# Altium PCB QPB-V1.PcbDoc
Units mm, origin at the board's own origin, x right, y up, seen from the top; angles counter-clockwise.
Board outline 60.25 x 30.25 mm, 2 copper layers (TopLayer, BottomLayer); 28 components, 10 nets, 74 pads, 290 vias.
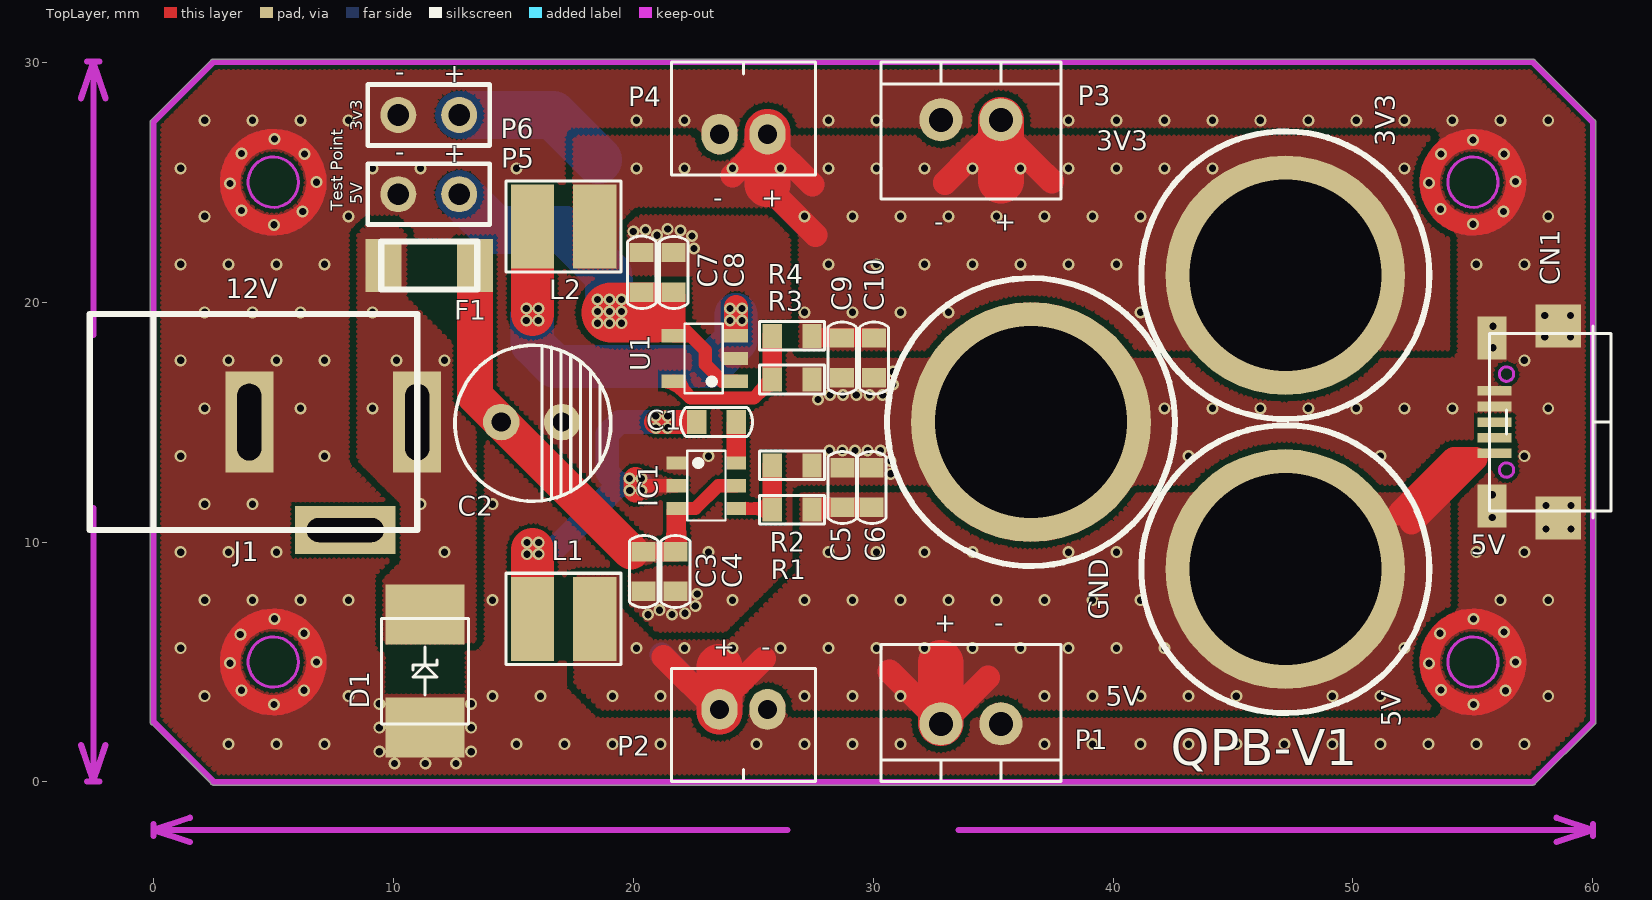
[diagram p0: TopLayer view]
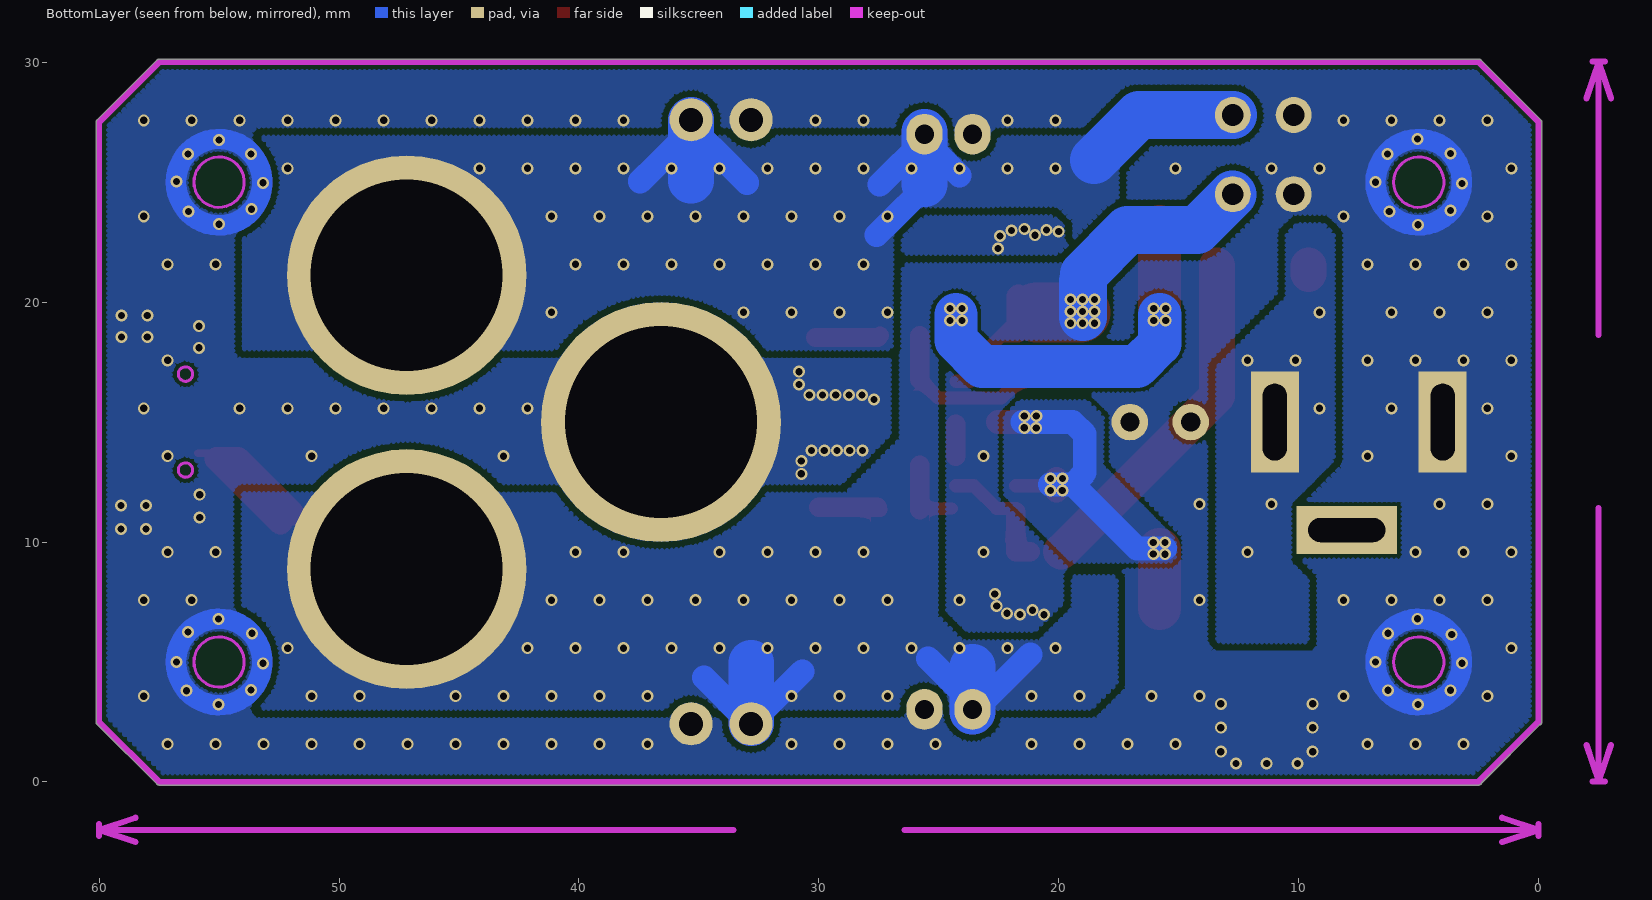
[diagram p1: BottomLayer view, seen from below]

## Layer stack, top to bottom
TopSolder: solder mask 0.0102, Solder Resist, Dk 3.5
TopLayer: signal copper 0.0711
Dielectric1: core 0.32, FR-4, Dk 4.8
BottomLayer: signal copper 0.0711
BottomSolder: solder mask 0.0102, Solder Resist, Dk 3.5

## Board outline
2.377,-0.035 -0.035,2.378 cw(c0,2.5) -0.127,2.5 -0.127,27.5 cw(c0,27.5) -0.09,27.591 -0.09,27.59 2.41,30.09 2.409,30.09 cw(c2.5,30) 2.5,30.127 57.5,30.127 cw(c57.5,30) 57.591,30.09 60.09,27.591 60.09,27.59 60.09,27.591 cw(c60,27.5) 60.127,27.5 60.127,2.5 cw(c60,2.5) 60.09,2.409 60.09,2.41 60.09,2.409 57.591,-0.09 57.59,-0.09 57.591,-0.09 cw(c57.5,0) 57.5,-0.127 2.5,-0.127 cw(c2.5,0)

## Design rules (kind name [scope] priority, off if disabled: settings)
Clearance 3v3-5v [InNet('+5V') vs InNet('3V3')] p1: gap=0.254 ignorepadtopadclearanceinfootprint=FALSE except(0: Arc-Hole Track-Hole SMDPad-Hole THPad-Hole Via-Hole Fill-Hole Poly-Hole Region-Hole Text-Hole)
Clearance 12v-gnd [InNet('+12V') vs InNet('GND')] p2: gap=0.254 ignorepadtopadclearanceinfootprint=FALSE except(0: Arc-Hole Track-Hole SMDPad-Hole THPad-Hole Via-Hole Fill-Hole Poly-Hole Region-Hole Text-Hole)
Clearance 5v-gnd [InNet('+5V') vs InNet('GND')] p3: gap=0.254 ignorepadtopadclearanceinfootprint=FALSE except(0: Arc-Hole Track-Hole SMDPad-Hole THPad-Hole Via-Hole Fill-Hole Poly-Hole Region-Hole Text-Hole)
Clearance 3v3-gnd [InNet('3V3') vs InNet('GND')] p4: gap=0.254 ignorepadtopadclearanceinfootprint=FALSE except(0: Arc-Hole Track-Hole SMDPad-Hole THPad-Hole Via-Hole Fill-Hole Poly-Hole Region-Hole Text-Hole)
Clearance GND-GGND [InNet('GGND') vs InNet('GND')] p5: gap=0.5 ignorepadtopadclearanceinfootprint=FALSE except(0: Arc-Hole Track-Hole SMDPad-Hole THPad-Hole Via-Hole Fill-Hole Poly-Hole Region-Hole Text-Hole)
Clearance [All] p6: gap=0.15 ignorepadtopadclearanceinfootprint=FALSE except(0: Arc-Hole Track-Hole SMDPad-Hole THPad-Hole Via-Hole Fill-Hole Poly-Hole Region-Hole Text-Hole)
ComponentClearance [All] p1 off: gap=0.254 collisioncheckmode=3 verticalgap=0.254 showdistances=FALSE
DiffPairsRouting [All] p1: maxlimit=0.6 minlimit=0.6 mostfreqgap=0.6 toplayer_minwidth=0.381 toplayer_maxwidth=0.381 toplayer_prefwidth=0.381 bottomlayer_minwidth=0.381 bottomlayer_maxwidth=0.381 bottomlayer_prefwidth=0.381 maxuncoupledlength=12.7
FabricationTestPointUsage TestPointUsage [All] p1: valid=0 allowmultiple=FALSE
FabricationTestpoint Testpoint [(IsPad And (OnTopLayer Or OnBottomLayer))] p1: side=3 testpointundercomponent=TRUE minsize=1.016 maxsize=2.54 preferedsize=1.524 minholesize=0.508 maxholesize=1.016 preferedholesize=0.813 testpointgrid=0.025 allowsidetop=TRUE allowsidebottom=TRUE usegrid=TRUE gridtolerance=0
HoleSize [All] p1: absolutevalues=TRUE maxlimit=5 minlimit=0.025 maxpercent=80.000 minpercent=20.000
HoleToHoleClearance [All] p1 off: gap=0.254 allowstackedmicrovias=TRUE
MinimumSolderMaskSliver [All] p1 off: minsoldermaskwidth=0.254
PolygonConnect [All] p1: connectstyle=Direct reliefconductorwidth=0.6 reliefentries=4 polygonreliefangle="90 Angle" airgapwidth=0.254
RoutingVias [All] p1: holewidth=0.3 width=0.5 viastyle="Through Hole" minholewidth=0.3 minwidth=0.453 maxholewidth=5 maxwidth=5
SilkToSilkClearance [All] p1 off: silktosilkclearance=0.254
SilkToSolderMaskClearance SilkscreenOverComponentPads [IsPad] p1 off: minsilkscreentomaskgap=0.254 clearancetoexposedcopper=TRUE
SolderMaskExpansion [All] p1: expansion=0.077 istentingtop=FALSE
Width [All] p1: maxlimit=5 minlimit=0.2 preferedwidth=0.2
21 further rules are at their usual default settings.

## Components (designator, comment, footprint, x,y, rotation, side; value= is the part's Value field where it differs from the comment)
C1 "0.1uF/16V" 0603C 23.475,15 r0 top
C2 "100uF/25V" "DIP CAP-6.5*2.54" 14.5,15 r270 top
C3 "10uF/25V" 0603C 20.439,8.773 r90 top
C4 "10uF/25V" 0603C 21.761,8.773 r90 top
C5 "22uF/16V" 0603C 28.718,12.273 r270 top
C6 "22uF/16V" 0603C 29.943,12.273 r270 top
C7 "4.7uF/16V" 0603C 20.355,21.239 r270 top
C8 "0.1uF/16V" 0603C 21.688,21.236 r270 top
C9 "10uF/6.3V" 0603C 28.713,17.673 r90 top
C10 "0.1uF/6.3V" 0603C 30.038,17.673 r90 top
CN1 "MicroUSB-SMD" USB--MICRO-WMRU2-05FLBSRF 58.2,15 r270 top
D1 "SMBJ15A" SMBJ40CA(TVS) 11.325,4.623 r90 top
F1 "FUSE 5x20mm 12V-1A  1206" 1206-FUSE 11.5,21.525 r270 top
IC1 "TPS562200" SOT-23-6-0.95mm 23.05,12.348 r270 top
J1 "DC JACK-2.5T" "DC JACK-2.5T-NEW" 4,15 r270 top locked
L1 "4.7uH" L3X3.5 17.1,6.8 r0 top
L2 "2.2uH" L3X3.5 17.1,23.148 r0 top
P1 "5V-2.5mm" WHITEWAFER2-25 34.075,2.425 r0 top
P2 "5V-2.0mm" WHITEWAFER2-200 24.6,3.025 r180 top
P3 "3V3-2.5mm" WHITEWAFER2-25 34.075,27.6 r180 top
P4 "3V3-2.0mm" WHITEWAFER2-200 24.6,27 r0 top
P5 "5V-2.54mm" HDR1X2 12.75,24.5 r180 top
P6 "3V3-2.54mm" HDR1X2 12.75,27.8 r180 top
R1 "56K 1%" 0603 26.625,11.348 r0 top
R2 "10K 1%" 0603 26.624,13.198 r180 top
R3 "549K 1%" 0603 26.625,18.597 r0 top
R4 "120K 1%" 0603 26.624,16.772 r180 top
U1 "TLV62565" SOT-23-5-0.95MM 22.939,17.651 r90 top

## Footprints (in the part's own frame and the unit in brackets; to place one, negate y for a bottom-side part, rotate by r counter-clockwise, add the part's x,y. Pads: shape width x height; smd on the part's side, far side on the other; paste and mask are expansions set on the pad)
0603 [mm] "0603L"
  rect 0.8x1 smd: 1(-0.825,0) 2(0.826,0)
  silkscreen extent -1.35,-0.6 1.35,0.6
0603C [mm]
  rect 0.8x1 smd: 1(-0.826,0) 2(0.825,0)
  silkscreen extent -1.51,-0.6 1.51,0.6
1206-FUSE [mm] "1206-FUSE"
  rect 2.2x1.5 smd: 1(0,-1.905) 2(0,1.905)
  silkscreen extent -1,-2 1,2
"DC JACK-2.5T-NEW" [mm] "DC JACK-2.5T-NEW"
  rect 4.2x2 hole 1 slot 3.2 at 0 deg: 1(0,7) 2(0,0)
  rect 2x4.2 hole 1 slot 3.2 at 90 deg: 3(4.498,4.001)
  silkscreen extent -4.5,-6.65 4.5,7
"DIP CAP-6.5*2.54" [mil]
  round 60 hole 31.5: 1(0,0) 2(0,100)
  silkscreen extent -126,-76 130,180
HDR1X2 [mm] "Connector; Header; 2 Position"
  round 1.5 hole 0.9: 1(0,0) 2(2.54,0)
  silkscreen extent -1.27,-1.27 3.81,1.27
L3X3.5 [mm]
  rect 1.8x3.5 smd: 1(-1.3,0) 2(1.3,0)
  silkscreen extent -2.4,-1.9 2.4,1.9
SMBJ40CA(TVS) [mm] "SMBJ40CA(TVS)"
  rect 2.5x3.3 smd: 1(-2.35,0) 2(2.35,0)
  silkscreen extent -2.2,-1.81 2.2,1.81
SOT-23-5-0.95MM [mm] "SOT-23-5-0.95MM"
  rect 0.55x1 smd: 1(-0.95,-1.35) 2(0,-1.35) 3(0.95,-1.35) 4(0.95,1.25) 5(-0.95,1.25)
  silkscreen extent -1.45,-0.8 1.45,0.8
SOT-23-6-0.95mm [mm] "SOT-23-6-0.95mm"
  rect 0.55x0.8 smd: 1(-0.95,-1.25) 2(0,-1.25) 3(0.95,-1.25) 4(0.95,1.25) 5(0,1.25) 6(-0.95,1.25)
  silkscreen extent -1.45,-0.8 1.45,0.8
USB--MICRO-WMRU2-05FLBSRF [mm] "USB--MICRO-WMRU2-05FLBSRF"
  rect 0.4x1.4 smd: 1(1.3,-2.3) 2(0.65,-2.3) 3(0,-2.3) 4(-0.65,-2.3) 5(-1.3,-2.3)
  rect 1.8x1.9 smd: 6(-4,0.35) 6(4,0.35)
  rect 1.8x1.2 smd: 6(-3.5,-2.4) 6(3.5,-2.4)
  KeepOutLayer circle w0.127: c-2,-1.8 r0.3
  KeepOutLayer circle w0.127: c2,-1.8 r0.3
  silkscreen extent -4,-2.5 4,2.55
WHITEWAFER2-25 [mm] "Connector; Header; 2 Position"
  round 1.8 hole 1: 1(-1.25,0) 2(1.25,0)
  silkscreen extent -3.75,-2.4 3.75,3.3
WHITEWAFER2-200 [mm]
  oval 1.5x1.7 hole 0.8: 1(-1,0) 2(1,0)
  silkscreen extent -3,-1.7 3,3

## Part data
C1 C3 C4 C5 C6 C7 C8 C9 C10: library part "Cap Semi", "Capacitor (Semiconductor SIM Model)"
C2: library part "C POL"
CN1: library part CON6, "Connector"
D1: library part PESD5V0L1BA, "Zener Diode"
F1: library part FUSE2, "Fuse"
J1: library part DCJACK-1, "Low Voltage Power Supply Connector"
L1: library part Inductor, "Inductor"
L2: library part L
P1 P3 P5 P6: library part "Header 2", "Header, 2-Pin"
P2 P4: library part 2PIN-200, "Connector"
R1 R2 R3 R4: library part "Res Semi", "Semiconductor Resistor"
U1: library part TL62565

## Free pads (board coordinates)
  round 10 hole 8: 0(36.58,15) 0(47.18,8.87) 0(47.18,21.12)

## Via types
v1: diameter 0.5, hole 0.3, TopLayer to BottomLayer, tented both sides, 246 vias
v2: diameter 0.5, hole 0.3, TopLayer to BottomLayer, 44 vias

## Nets (pads, with @x,y where several pads share a name; then routed paths per layer and width w, separated by ;. In a path a pad name is that pad's centre, name@x,y a point inside that pad or via, vN(x,y) a via of type N, cw(c..) or ccw(c..) an arc to the next point about the centre after c; other vN are vias at no path point)
3V3: C9.2 C10.2 L2.2 P3.1 P4.2 P6.1 pad.0@47.18,21.12 R3.2 | length 59.9
  TopLayer w0.75: R3.2@27.461,18.618 R3.2@27.546,18.532
  TopLayer w0.8: R3.2@27.546,18.52 C10.2@30.147,18.52
  TopLayer w1: 24.141,25.271 P4.2@25.6,26.73 ; P4.2@25.6,26.76 27.467,24.893 ; 25.726,24.669 26.98,23.416 27.593,22.802 ; 32.998,24.988 34.113,26.103 P3.1@34.865,26.855 ; 33.003,24.967 34.126,26.09 P3.1@34.87,26.834 ; P3.1@35.585,26.905 36.777,25.713 37.452,25.038 ; P3.1@35.59,26.884 36.769,25.705 37.457,25.017
  TopLayer w1.9: 25.6,24.92 P4.2@25.6,26.93 ; P4.2@25.6,26.76 P4.2@25.6,27.1 ; 35.325,25.075 P3.1 ; 35.33,25.054 P3.1@35.33,27.579
  BottomLayer w1: 24.141,25.271 P4.2@25.6,26.73 ; P4.2@25.6,26.76 27.467,24.893 ; 25.726,24.659 26.975,23.411 27.593,22.792 ; 32.998,24.988 34.113,26.103 P3.1@34.865,26.855 ; 33.003,24.967 34.126,26.09 P3.1@34.87,26.834 ; P3.1@35.585,26.905 36.777,25.713 37.452,25.038 ; P3.1@35.59,26.884 36.769,25.705 37.457,25.017
  BottomLayer w1.9: 25.6,24.92 P4.2@25.6,26.93 ; P4.2@25.6,26.73 25.6,26.76 P4.2@25.6,27.1 ; 35.325,25.075 P3.1 ; 35.33,25.054 P3.1@35.33,27.579
  BottomLayer w2: P6.1 16.657,27.8 18.538,25.918
  other v1: 27.14,19.576 29.14,19.576 31.14,19.576 33.14,19.576 41.14,19.576 28.14,21.576 30.14,21.576 32.14,21.576 34.14,21.576 36.14,21.576 38.14,21.576 40.14,21.576 27.14,23.576 29.14,23.576 31.14,23.576 33.14,23.576 35.14,23.576 37.14,23.576 39.14,23.576 41.14,23.576 20.14,25.576 22.14,25.576 24.14,25.576 26.14,25.576 28.14,25.576 30.14,25.576 32.14,25.576 34.14,25.576 36.14,25.576 38.14,25.576 40.14,25.576 42.14,25.576 44.14,25.576 52.14,25.576
+5V: C5.2 C6.2 C7.2 C8.2 CN1.1 L1.2 P1.1 P2.2 P5.1 pad.0@47.18,8.87 R1.2 U1.1 U1.4 | length 59.2
  TopLayer w0.3: 55.16,13.7 CN1.1
  TopLayer w0.55: U1.4 22.388,18.601 ; 21.958,19.041 22.576,18.423 23.006,17.993 23.006,17.411 23.711,16.705 U1.1@23.832,16.705 ; U1.1@23.857,16.699 U1.1@24.283,16.699
  TopLayer w0.6: R1.2 R1.2@27.552,11.45
  TopLayer w0.8: R1.2@27.552,11.447 C6.2@30.003,11.447
  TopLayer w1: 21.272,5.216 P2.2@23.553,2.935 ; U1.4@21.691,18.836 C8.2@21.691,20.23 ; P2.2@23.243,3.659 23.964,3.659 25.445,5.14 ; 30.693,4.608 P1.1@32.56,2.741 ; P1.1@32.93,2.491 34.797,4.358 ; 51.936,11.2 54.206,13.47 54.6,13.47 55.1,13.47 52.436,10.806
  TopLayer w1.9: P2.2@23.6,2.925 23.6,4.8 ; P1.1@32.82,2.446 32.82,4.971
  TopLayer w2.5: v1@19.099,19.57 20.94,19.57
  BottomLayer w1: 21.19,5.305 P2.2@23.6,2.895 ; P2.2@23.6,3.295 25.445,5.14 ; 30.693,4.608 P1.1@32.56,2.741 ; P1.1@32.93,2.491 34.797,4.358
  BottomLayer w1.9: P2.2@23.6,2.925 23.6,4.8 ; P1.1@32.82,2.446 32.82,4.971
  BottomLayer w2: P5.1@12.76,24.48 14.24,23 17.14,23 18.96,21.18 ; v1@19,19.376 19,20.88
  other v1: 19.14,3.576 21.14,3.576 27.14,3.576 29.14,3.576 31.14,3.576 37.14,3.576 39.14,3.576 41.14,3.576 43.14,3.576 45.14,3.576 49.14,3.576 51.14,3.576 20.14,5.576 22.14,5.576 24.14,5.576 26.14,5.576 28.14,5.576 30.14,5.576 32.14,5.576 34.14,5.576 36.14,5.576 38.14,5.576 40.14,5.576 42.14,5.576 52.14,5.576 27.14,7.576 29.14,7.576 31.14,7.576 33.14,7.576 35.14,7.576 37.14,7.576 39.14,7.576 41.14,7.576 28.14,9.576 30.14,9.576 32.14,9.576 34.14,9.576 38.14,9.576 40.14,9.576 18.518,19.12 19.018,19.12 19.518,19.12 18.518,19.61 19.018,19.61 19.518,19.61 18.518,20.104 19.018,20.11 19.518,20.11
+12V: D1.2 F1.1 J1.1 | length 0.3
  TopLayer w1.5: F1.1@9.595,21.175 F1.1
  other v1: 12.14,9.576 11.14,11.576 9.14,15.576 10.14,17.576 12.14,17.576 9.14,19.576
GND: C2.2 C3.1 C4.1 C5.1 C6.1 C7.1 C8.1 C9.1 C10.1 CN1.4 CN1.5 CN1.6 D1.1 IC1.1 J1.2 P1.2 P2.1 P3.2 P4.1 P5.2 P6.2 pad.0@36.58,15 R2.1 R4.1 U1.2 | length 90.5
  TopLayer w0.85: v2(6.8,5) ccw(c5,5) v2(6.8,5) ; v2@6.8,25 ccw(c5,25) v2@6.8,25 ; v2@56.8,5 ccw(c55,5) v2@56.8,5 ; v2@56.8,25 ccw(c55,25) v2@56.8,25
  BottomLayer w0.85: v2(6.8,5) ccw(c5,5) v2(6.8,5) ; v2@6.8,25 ccw(c5,25) v2@6.8,25 ; v2@56.8,5 ccw(c55,5) v2@56.8,5 ; v2@56.8,25 ccw(c55,25) v2@56.8,25
  other v1: 10.058,0.764 11.335,0.764 12.612,0.764 9.42,1.263 13.25,1.263 3.14,1.576 5.14,1.576 7.14,1.576 15.14,1.576 17.14,1.576 19.14,1.576 21.14,1.576 25.14,1.576 27.14,1.576 29.14,1.576 31.14,1.576 37.14,1.576 39.14,1.576 41.14,1.576 43.14,1.576 45.14,1.576 47.14,1.576 49.14,1.576 51.14,1.576 53.14,1.576 55.14,1.576 57.14,1.576 9.42,2.262 13.25,2.262 9.42,3.26 13.25,3.26 2.14,3.576 8.14,3.576 14.14,3.576 16.14,3.576 58.14,3.576 1.14,5.576 20.62,6.97 21.62,6.98 22.16,7.03 21.1,7.16 22.59,7.33 2.14,7.576 4.14,7.576 6.14,7.576 8.14,7.576 14.14,7.576 24.14,7.576 56.14,7.576 58.14,7.576 22.67,7.84 1.14,9.576 3.14,9.576 5.14,9.576 23.14,9.576 55.14,9.576 57.14,9.576 2.14,11.576 4.14,11.576 14.14,11.576 30.735,12.844 30.735,13.374 1.14,13.576 7.14,13.576 23.14,13.576 43.14,13.576 51.14,13.576 57.14,13.576 28.185,13.815 28.715,13.815 29.245,13.815 29.775,13.815 30.305,13.815 2.14,15.576 6.14,15.576 42.14,15.576 44.14,15.576 46.14,15.576 48.14,15.576 50.14,15.576 52.14,15.576 54.14,15.576 58.14,15.576 27.71,15.941 28.2,16.13 28.75,16.13 29.3,16.13 29.85,16.13 30.4,16.13 30.83,16.571 30.83,17.101 1.14,17.576 3.14,17.576 5.14,17.576 7.14,17.576 57.14,17.576 2.14,19.576 4.14,19.576 6.14,19.576 1.14,21.576 3.14,21.576 5.14,21.576 7.14,21.576 55.14,21.576 57.14,21.576 22.53,22.23 22.45,22.75 20.99,22.79 20.007,22.944 21.97,22.98 20.52,23.01 21.44,23.05 2.14,23.576 8.14,23.576 58.14,23.576 1.14,25.576 9.14,25.576 11.14,25.576 15.14,25.576 2.14,27.576 4.14,27.576 6.14,27.576 8.14,27.576 20.14,27.576 22.14,27.576 28.14,27.576 30.14,27.576 38.14,27.576 40.14,27.576 42.14,27.576 44.14,27.576 46.14,27.576 48.14,27.576 50.14,27.576 52.14,27.576 54.14,27.576 56.14,27.576 58.14,27.576
  other v2: 5.025,3.225 55.02,3.223 56.36,3.803 3.675,3.823 6.275,3.823 53.67,3.833 3.2,4.95 53.175,4.948 56.775,4.998 3.625,6.148 6.275,6.198 53.625,6.198 56.3,6.248 5.05,6.8 55.025,6.798 58.043,10.548 59.093,10.548 55.81,11.023 58.043,11.523 59.093,11.523 55.81,11.973 55.835,18.098 57.993,18.548 59.068,18.548 55.835,18.998 57.993,19.448 59.068,19.448 5.025,23.223 55.01,23.248 6.225,23.773 56.275,23.773 3.675,23.823 53.65,23.873 3.2,24.948 53.175,24.973 6.8,24.998 56.775,25.023 6.3,26.173 53.67,26.17 56.3,26.173 3.675,26.198 55.01,26.76 5.05,26.798
NetC1_1: C1.1 IC1.2 L1.1 | length 17.2
  TopLayer w0.55: 20.151,12.348 IC1.2
  TopLayer w1: v1@20.103,12.139 v1@20.103,12.62 ; v1@20.944,15.011 C1.1@22.53,14.999
  TopLayer w1.8: L1.1@15.8,7.23 15.8,9.69
  BottomLayer w1: v1@15.575,9.739 16.749,9.739 19.41,12.4 ; v1@20.36,12.4 19.41,12.4 ; 21.515,15.01 19.43,15.01 18.92,14.5 18.92,12.89 19.41,12.4
  other v1: 15.575,9.495 16.064,9.497 15.574,9.987 16.064,9.987 19.854,12.147 20.35,12.148 19.85,12.648 20.35,12.648 20.943,14.759 21.439,14.76 20.939,15.26 21.439,15.26
NetC1_2: C1.2 IC1.6 | length 1.4
  TopLayer w0.8: IC1.6@24.3,13.564 C1.2@24.3,14.923
NetC2_1: C2.1 C3.2 C4.2 F1.2 IC1.3 IC1.5 | length 19.7
  TopLayer w0.55: IC1.3 22.593,11.398 23.543,12.348 IC1.5
  TopLayer w0.8: 21.189,9.598 C4.2@21.8,9.598 ; C4.2@21.799,9.598 C4.2@21.8,9.599 ; C4.2@21.8,9.699 IC1.3@21.8,11.27
  TopLayer w1.5: F1.2 13.405,16.095 C2.1 19.9,9.6
NetIC1_4: IC1.4 R1.1 R2.2 | length 3.2
  TopLayer w0.5: IC1.4@24.45,11.398 R1.1@25.775,11.398
  TopLayer w0.8: R1.1@25.775,11.398 R1.1 R2.2 R2.2
NetL2_1: L2.1 U1.3 | length 16.2
  TopLayer w1: U1.3@24.289,18.849 24.289,19.79
  TopLayer w1.8: 15.8,19.488 L2.1
  BottomLayer w1.8: 15.796,19.483 15.796,18.264 16.74,17.32 23.2,17.32 24.289,18.409 24.289,19.483
  other v1: 24.039,19.231 24.54,19.231 15.548,19.24 16.048,19.24 15.548,19.734 16.048,19.74 24.04,19.731 24.538,19.731
NetR3_1: R3.1 R4.2 U1.5 | length 6.5
  TopLayer w0.55: U1.5 22.39,15.999 25.026,15.999 R4.2
  TopLayer w0.8: R4.2 R3.1
pads on no net: CN1.2 CN1.3 J1.3

## Polygon pours and split planes (outlines as drawn)
NetC1_1 on TopLayer "TopLayer-No Net 1" (hatched 90Degree grid 0.2 track 0.2, pour order 1000): 20.328,12.969 21.737,12.519 21.737,12.177 20.333,11.795
NetC2_1 on TopLayer "TopLayer-No Net 1" (hatched 90Degree grid 0.2 track 0.2, pour order 1001): 19.829,10.252 19.829,8.949 21.202,9.301 21.202,9.9
+12V on TopLayer "TopLayer-No Net 1" (hatched 90Degree grid 0.2 track 0.2, remove dead copper, pour order 1012): 13.3,5.83 13.4,5.93 13.4,17.29 10.5,20.19 10.5,22.82 10.09,23.23 8.96,23.23 8.55,22.82 8.55,13.45 10.36,11.64 10.36,9.14 9.64,8.42 9.64,5.83
3V3 on TopLayer "TopLayer-No Net 1" (hatched 90Degree grid 0.2 track 0.2, remove dead copper, pour order 1004): 53.964,18.046 53.964,26.876 17.56,26.876 17.56,21.441 19.36,21.441 19.36,23.339 20.044,24.023 26.945,23.994 26.973,18.04
+5V on TopLayer "TopLayer-No Net 1" (hatched 90Degree grid 0.2 track 0.2, remove dead copper, pour order 1006): 17.6,4.098 18.652,3.059 54.005,3.061 53.996,11.986 51.99,11.986 27.002,11.986 27.002,8.859 24.002,5.859 20.806,5.859 19.42,7.245 19.42,8.558 17.722,8.559 17.602,8.439
GND on TopLayer "TopLayer-No Net 1" (hatched 90Degree grid 0.2 track 0.2, remove dead copper, pour order 1011): 2.5,0.045 2.523,0.023 57.5,0.023 60,2.523 60,27.523 57.5,30.023 2.5,30.023 0,27.523 0,2.545
+5V on BottomLayer "TopLayer-No Net 1" (hatched 90Degree grid 0.2 track 0.2, remove dead copper, pour order 1009): 30.861,11.745 29.154,11.745 26.591,14.308 26.591,21.57 19.12,21.57 19.12,17.915 25.096,17.923 25.096,8.447 25.097,6.369 27.358,6.374
NetC1_1 on BottomLayer "TopLayer-No Net 1" (hatched 90Degree grid 0.2 track 0.2, remove dead copper, pour order 1007): 15.152,9.397 15.36,9.189 16.749,9.189 16.759,9.179 19.429,9.179 22.249,11.999 22.249,15.249 21.639,15.859 20.95,15.861 18.834,15.862 18.183,15.249 18.19,13.17 15.169,10.079
+12V on BottomLayer "TopLayer-No Net 1" (hatched 90Degree grid 0.2 track 0.2, remove dead copper, pour order 1002): 13.3,5.83 13.4,5.93 13.4,17.29 10.5,20.19 10.5,22.82 10.09,23.23 8.96,23.23 8.55,22.82 8.55,13.45 10.36,11.64 10.36,9.14 9.64,8.42 9.64,5.83
3V3 on BottomLayer "TopLayer-No Net 1" (hatched 90Degree grid 0.2 track 0.2, remove dead copper, pour order 1008): 54,23.917 54,26.25 17.597,26.25 17.597,24.066
3V3 on BottomLayer "TopLayer-No Net 1" (hatched 90Degree grid 0.2 track 0.2, remove dead copper, pour order 1003): 53.964,18.046 53.964,26.876 17.56,26.876 17.56,21.441 19.36,21.441 19.36,23.339 20.044,24.023 26.945,23.994 26.973,18.04
+5V on BottomLayer "TopLayer-No Net 1" (hatched 90Degree grid 0.2 track 0.2, remove dead copper, pour order 1005): 17.6,4.098 18.652,3.059 53.993,3.059 54.004,12.024 27.002,11.995 27.002,8.859 24.002,5.859 20.806,5.859 19.42,7.245 19.42,8.558 17.722,8.559 17.602,8.439
GND on BottomLayer "TopLayer-No Net 1" (hatched 90Degree grid 0.2 track 0.2, remove dead copper, pour order 1010): 2.5,0.023 2.523,0 57.5,0 60,2.5 60,27.5 57.5,30 2.5,30 0,27.5 0,2.523

## Keep-outs
KeepOutLayer:
  circle w0.127: c5,25 r1.05
  circle w0.127: c5,5 r1.05
  circle w0.127: c55,25 r1.05
  circle w0.127: c55,5 r1.05
  lines w0.254: -3.008,1.547 -2.5,0.023 ; -3.008,28.499 -2.5,30.023 ; -2.754,0.023 -2.246,0.023 ; -2.754,30.023 -2.246,30.023 ; -2.5,11.424 -2.5,0.023 ; -2.5,18.622 -2.5,30.023 ; -1.992,1.547 -2.5,0.023 ; -1.992,28.499 -2.5,30.023 ; 0,-2.254 0,-1.746 ; 0,2.5 0,27.5 2.5,30 57.5,30 60,27.5 60,2.5 57.5,0 2.5,0 ; 1.524,-2.508 0,-2 ; 1.524,-1.492 0,-2 ; 26.441,-2 0,-2 ; 33.559,-2 60,-2 ; 58.476,-2.508 60,-2 ; 58.476,-1.492 60,-2 ; 60,-2.254 60,-1.746 ; 0,2.523 2.5,0.023 0,2.523
  text "30mm" at -1.586,11.678 h1.52 r90
  text "60mm" at 26.695,-2.914 h1.52

## Other copper
TopLayer:
  pour cut-out: 16.784,8.627 16.784,4.973 17.43,4.973 17.43,8.627
  pour cut-out: 17.499,24.945 16.699,24.945 16.699,21.37 17.499,21.37
  pour cut-out: 13.075,3.598 13.075,5.65 9.6,5.65 9.575,3.598
  pour cut-out: 10.515,22.7 10.515,20.35 12.665,20.35 12.665,22.7

## Silkscreen, mask and mechanical layers (free items; w line width, h text height)
TopOverlay:
  circle w0.254: c47.18,8.87 r6
  circle w0.254: c36.58,15 r6
  circle w0.254: c47.18,21.12 r6
  text "+" at 13.017,29.829 h0.8 r180
  text "-" at 10.477,29.8 h0.8 r180
  text "3v3" at 8.7,27.134 h0.5 r90
  text "+" at 13.017,26.5 h0.8 r180
  text "3V3" at 51.736,26.5 h0.8 r90
  text "-" at 10.477,26.471 h0.8 r180
  text "3V3" at 39.3,26.335 h0.8
  text "5V" at 8.7,24.083 h0.5 r90
  text "-" at 23.333,23.97 h0.8
  text "+" at 25.333,23.97 h0.8
  text "Test Point" at 7.9,23.8 h0.5 r90
  text "-" at 32.558,22.97 h0.8
  text "+" at 35.058,22.97 h0.8
  text "12V" at 3.01,20.17 h0.8
  text "5V" at 54.92,9.49 h0.8
  text "GND" at 39.8,6.771 h0.8 r90
  text "+" at 32.558,6.255 h0.8
  text "-" at 35.058,6.255 h0.8
  text "+" at 23.333,5.255 h0.8
  text "-" at 25.333,5.255 h0.8
  text "5V" at 39.7,3.171 h0.8
  text "5V" at 52,2.3 h0.8 r90
  text "QPB-V1" at 42.4,0.7 h1.5
TopSolder:
  circle w1: c5,5 r1.8
  circle w1: c5,25 r1.8
  circle w1: c55,25 r1.8
  circle w1: c55,5 r1.8
BottomSolder:
  circle w1: c5,5 r1.8
  circle w1: c5,25 r1.8
  circle w1: c55,25 r1.8
  circle w1: c55,5 r1.8